# Altium PCB QFN-24_L4.0-W4.0-P0.50-BL-EP2.7_2021-11-14.pcbdoc
Units mm, origin at the board's own origin, x right, y up, seen from the top; angles counter-clockwise.
Board outline 34.14 x 30.98 mm, 2 copper layers (Top Layer, Bottom Layer); 1 components, 0 nets, 25 pads, 0 vias.
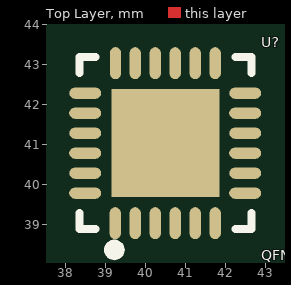
[diagram p0: Top Layer view]
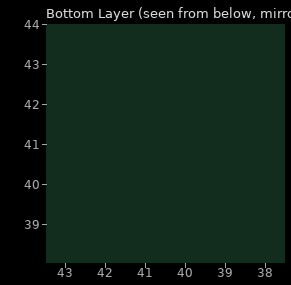
[diagram p1: Bottom Layer view, seen from below]

## Layer stack, top to bottom
Top Layer: signal copper (thickness not stored)
Dielectric: dielectric 0.32, FR-4, Dk 4.8
Bottom Layer: signal copper (thickness not stored)

## Board outline
59.537,25.4 25.4,25.4 25.4,56.376 59.537,56.376

## Components (designator, comment, footprint, x,y, rotation, side; value= is the part's Value field where it differs from the comment)
U? "QFN-24_L4.0-W4.0-P0.50-BL-EP2.7" QFN-24_L4.0-W4.0-P0.50-BL-EP2.7 40.5,40.761 r0 top

## Footprints (in the part's own frame and the unit in brackets; to place one, negate y for a bottom-side part, rotate by r counter-clockwise, add the part's x,y. Pads: shape width x height; smd on the part's side, far side on the other; paste and mask are expansions set on the pad)
QFN-24_L4.0-W4.0-P0.50-BL-EP2.7 [mm]
  oval 0.28x0.8 smd: 1(-1.25,-1.739) 2(-0.75,-1.739) 3(-0.25,-1.739) 4(0.25,-1.739) 5(0.75,-1.739) 6(1.25,-1.739) 13(1.25,2.261) 14(0.75,2.261) 15(0.25,2.261) 16(-0.25,2.261) 17(-0.75,2.261) 18(-1.242,2.261)
  oval 0.8x0.28 smd: 7(2,-0.989) 8(2,-0.489) 9(2,0.011) 10(2,0.511) 11(2,1.011) 12(2,1.511) 19(-2,1.511) 20(-2,1.011) 21(-2,0.511) 22(-2,0.011) 23(-2,-0.489) 24(-2,-0.989)
  rect 2.7x2.7 smd: 25(0.012,0.261)
  silkscreen extent -2.14,-2.66 2.16,2.41

## Nets (pads, with @x,y where several pads share a name; then routed paths per layer and width w, separated by ;. In a path a pad name is that pad's centre, name@x,y a point inside that pad or via, vN(x,y) a via of type N, cw(c..) or ccw(c..) an arc to the next point about the centre after c; other vN are vias at no path point)
pads on no net: U?.1 U?.2 U?.3 U?.4 U?.5 U?.6 U?.7 U?.8 U?.9 U?.10 U?.11 U?.12 U?.13 U?.14 U?.15 U?.16 U?.17 U?.18 U?.19 U?.20 U?.21 U?.22 U?.23 U?.24 U?.25